# EAGLE board PCB (EAGLE 9.7.0)
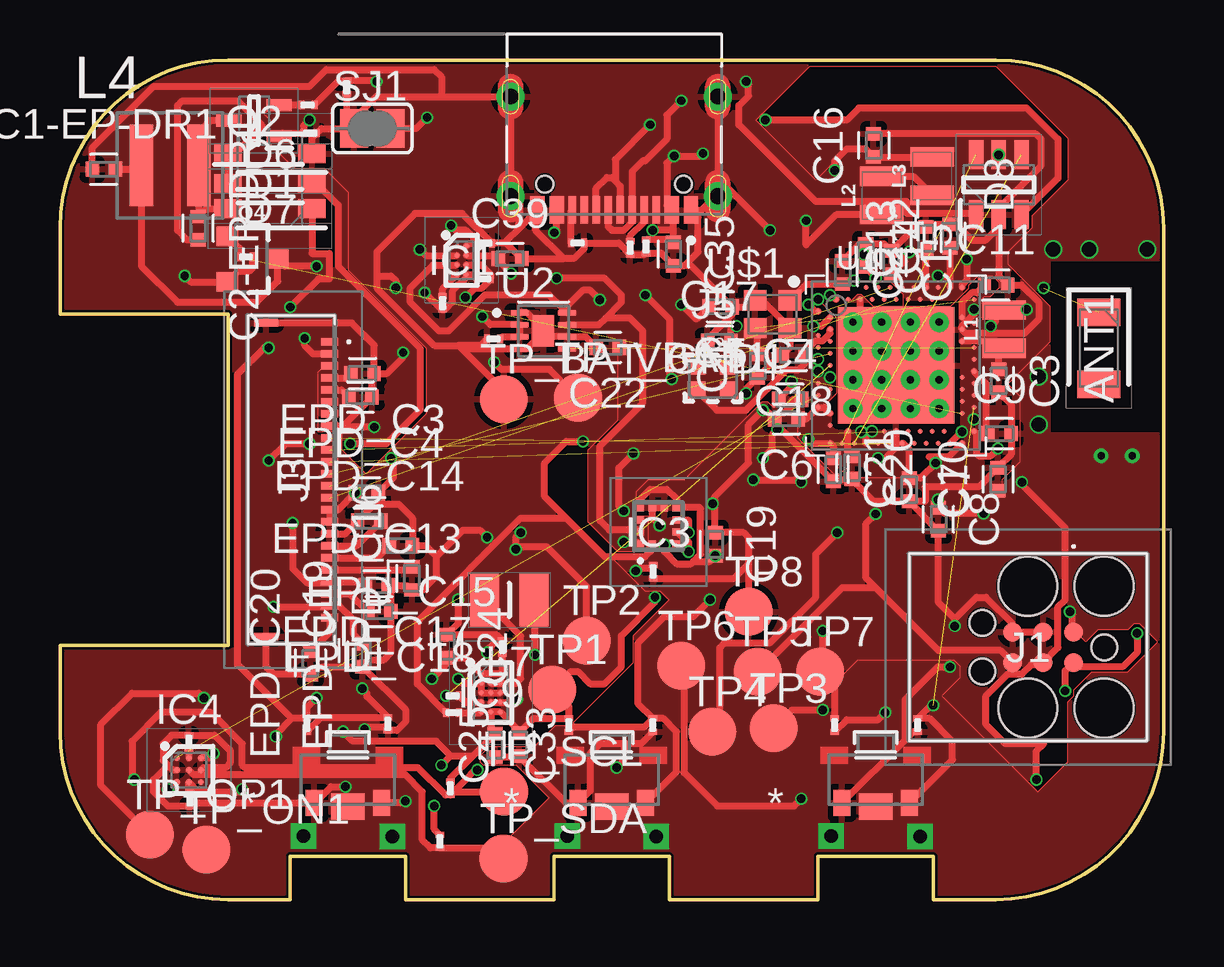
[diagram p0: board, top side]
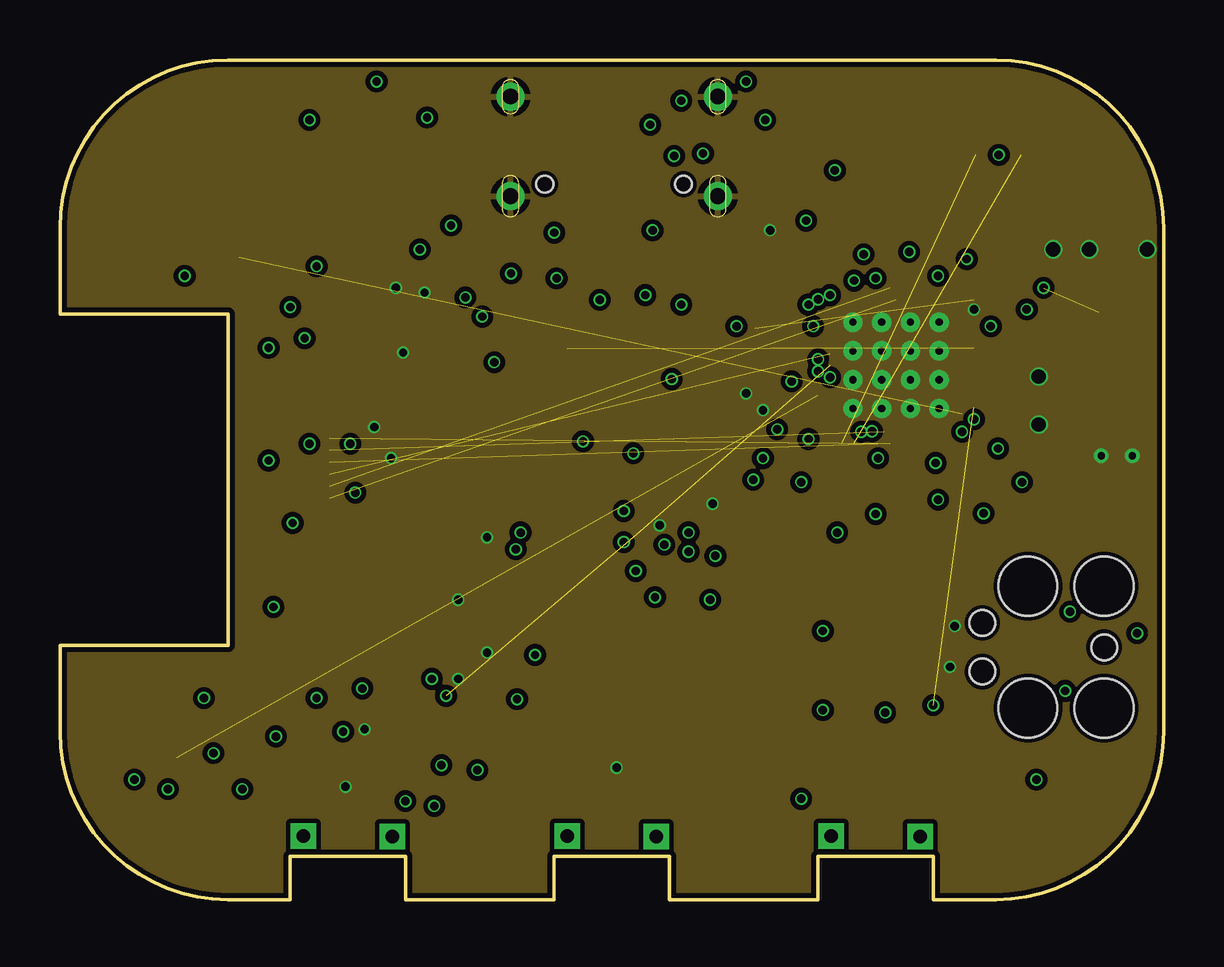
[diagram p1: board, inner layer Route2]
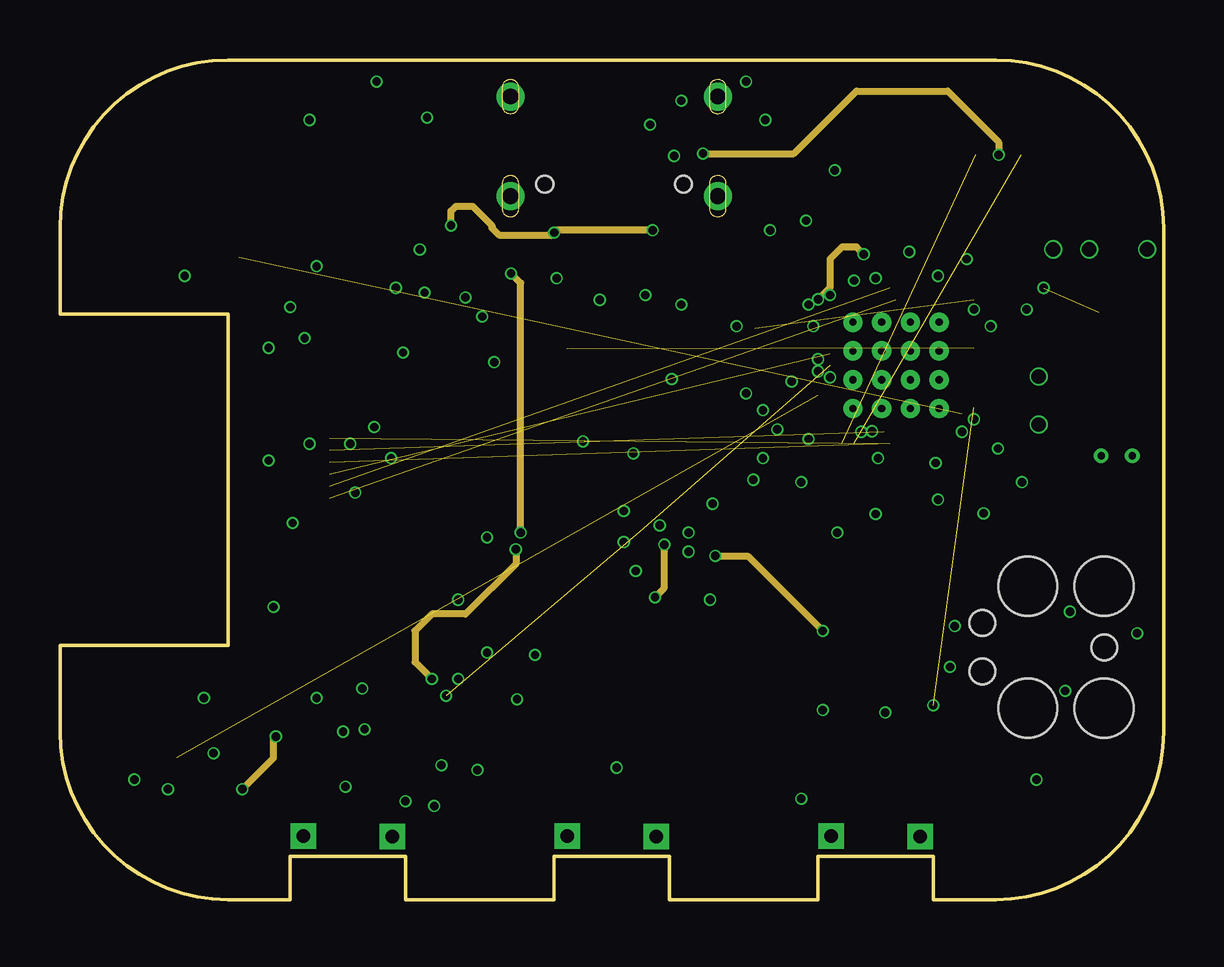
[diagram p2: board, inner layer Route15]
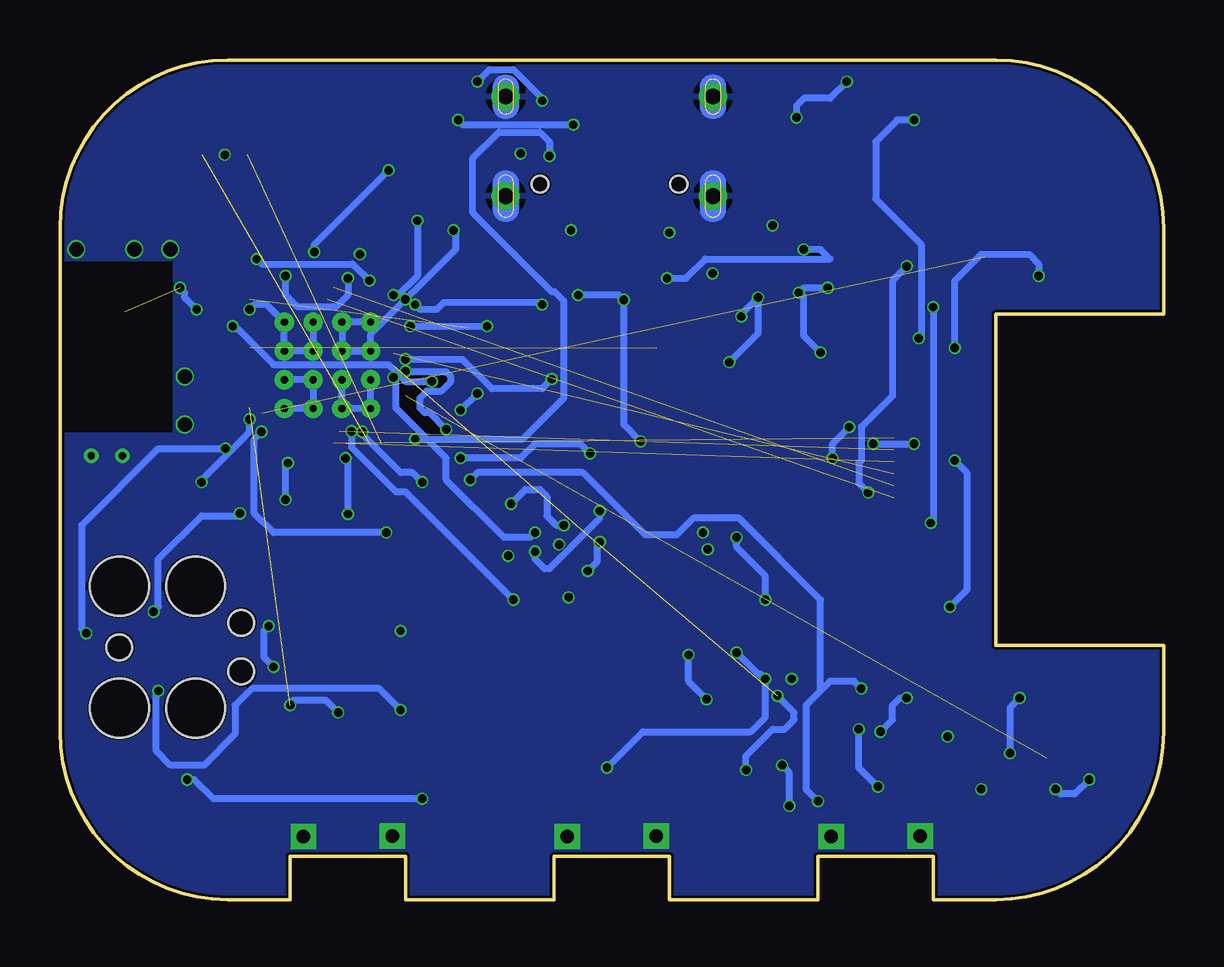
[diagram p3: board, bottom side, seen from below]

Size 46 x 35 mm. Coordinates in mm from the lower left corner, seen from the top.
Outline: 39,0 36.4,0 36.4,1.8 31.6,1.8 31.6,0 25.4,0 25.4,1.8 20.6,1.8 20.6,0 14.4,0 14.4,1.8 9.6,1.8 9.6,0 7,0 arc-90 0,7 0,10.6 7,10.6 7,24.4 0,24.4 0,28 arc-90 7,35 39,35 arc-90 46,28 46,7 arc-90 39,0
Copper layers (1+2*15+16): Top 0.035mm / dielectric 1.6mm / Route2 0.035mm / dielectric 0.15mm / Route15 0.035mm / dielectric 0.2mm / Bottom 0.035mm
Design rules "jlcpcb-2layers.dru *": minimum track width 0.04mm, minimum drill 0.3mm, track to track 0mil, track to pad 0mil, pad to pad 5mil, via to via 5mil, smd to smd 5mil, copper to edge 0.1mm, drill to drill 6mil, minimum pad ring 10mil, minimum via ring 3mil, stop-mask expansion 4mil, vias tented up to drill 0mil, thermal gap 10mil
tKeepout: area 41.3,19.5 to 45.8,26.6
tRestrict: area 41.3,19.5 to 45.8,26.6; 2 lines
bRestrict: area 41.3,19.5 to 45.8,26.6
vRestrict: area 41.3,19.5 to 45.8,26.6

## Footprints (pad centres in the part's own frame; a part is rotated, then mirrored left to right if it is on the bottom)
2450AT18B100E_ANTC3216X140N = smd 1.15 x 1.8: 1 -1.5,0; 2 1.5,0
CAPC1005X60 = smd 0.56 x 0.629: 1 -0.485,0; 2 0.485,0
GRM011R60J152KE01L_1_0201 = smd 0.35 x 0.25: 1 0,0.275; 2 0,-0.275
ESP32_C6_LIBRARY_5_SOD3716X135N = smd 1.15 x 0.8: 1 -1.75,0; 2 1.75,0
ESP32_C6_LIBRARY_3_SOT95P280X145-6N = smd 1.2 x 0.6: 1 -1.25,0.95; 2 -1.25,0; 3 -1.25,-0.95; 4 1.25,-0.95; 5 1.25,0; 6 1.25,0.95
BQ25180YBGR_BGA8C40P2X4_100X155X50 = smd 0.2 x 0.2: A1 -0.2,0.6; A2 0.2,0.6; B1 -0.2,0.2; B2 0.2,0.2; C1 -0.2,-0.2; C2 0.2,-0.2; D1 -0.2,-0.6; D2 0.2,-0.6
BMA423_BMA423 = smd 0.3 x 0.35: 1 -0.75,-0.775; 2 -0.25,-0.775; 3 0.25,-0.775; 4 0.75,-0.775; 7 0.75,0.775; 8 0.25,0.775; 9 -0.25,0.775; 10 -0.75,0.775 | smd 0.35 x 0.3: 5 0.775,-0.25; 6 0.775,0.25; 11 -0.775,0.25; 12 -0.775,-0.25
DRV2605YZFR_BGA9C50P3X3_144X144X62 = smd 0.25 x 0.25: A1 -0.5,0.5; A2 0,0.5; A3 0.5,0.5; B1 -0.5,0; B2 0,0; B3 0.5,0; C1 -0.5,-0.5; C2 0,-0.5; C3 0.5,-0.5
RT6160AWSC_BGA15C40P3X5_140X230X60 = smd 0.216 x 0.216: A1 -0.4,0.8; A2 0,0.8; A3 0.4,0.8; B1 -0.4,0.4; B2 0,0.4; B3 0.4,0.4; C1 -0.4,0; C2 0,0; C3 0.4,0; D1 -0.4,-0.4; D2 0,-0.4; D3 0.4,-0.4; E1 -0.4,-0.8; E2 0,-0.8; E3 0.4,-0.8
TC2030-IDC_TC2030IDC = smd 0.783 x 0.783: 1 -0.953,-0.635; 2 -0.953,0.635; 3 0.317,-0.635; 4 0.317,0.635; 5 1.588,-0.635; 6 1.588,0.635 | hole 2.451: -2.223,-2.54; -2.223,2.54; 0.952,-2.54; 0.952,2.54 | hole 1.067: -2.223,0; 2.857,-1.016; 2.857,1.016
503480-2400_5034802400 = smd 0.3 x 0.7: 1 -5.75,1.525; 2 -5.25,1.525; 3 -4.75,1.525; 4 -4.25,1.525; 5 -3.75,1.525; 6 -3.25,1.525; 7 -2.75,1.525; 8 -2.25,1.525; 9 -1.75,1.525; 10 -1.25,1.525; 11 -0.75,1.525; 12 -0.25,1.525; 13 0.25,1.525; 14 0.75,1.525; 15 1.25,1.525; 16 1.75,1.525; 17 2.25,1.525; 18 2.75,1.525; 19 3.25,1.525; 20 3.75,1.525; 21 4.25,1.525; 22 4.75,1.525; 23 5.25,1.525; 24 5.75,1.525 | smd 0.3 x 1: MP1 -6.54,-1.125; MP2 6.54,-1.125
KH-TYPE-C-16P_KINGHELM_KH-TYPE-C-16P = smd 0.6 x 1.15: A1_B12 -3.2,4.725; A4_B9 -2.4,4.725; A9_B4 2.4,4.725; A12_B1 3.2,4.725 | smd 0.3 x 1.15: A5 -1.25,4.725; A6 -0.25,4.725; A7 0.25,4.725; A8 1.25,4.725; B5 1.75,4.725; B6 0.75,4.725; B7 -0.75,4.725; B8 -1.75,4.725 | drill 0.65 pad 1.05: SH1 -4.32,0; SH2 4.32,0; SH3 -4.32,4.15; SH4 4.32,4.15 | hole 0.7: -2.89,3.65; 2.89,3.65
0805-WIDE = smd 0.8 x 1.8: 1 -0.8,0; 2 0.8,0
XFL4020 = smd 0.98 x 3.4: P$1 1,1.8; P$2 3.4,1.8
MLP2016SR47MT0S1_INDC2016X100N = smd 1.2 x 2.2: 1 -1.028,0; 2 1.028,0
ESP32_C6_LIBRARY_6_SOT65P210X110-3N = smd 1.05 x 0.5: 1 -1.05,0.65; 2 -1.05,-0.65; 3 1.05,0
ESP32_C6_LIBRARY_4_ESP32_C6_LIBRARY_4_ESP32_C6_LIBRARY_4_ESP32_C6_LIBRARY_4_ESP32_WROVER_SPARKFUN-DISCRETESEMI_SOT23-3 = smd 0.8 x 0.9: 1 -0.95,-1; 2 0.95,-1; 3 0,1.1
CPF0201D7K68C1_0201 = smd 0.35 x 0.25: 1 0,0.275; 2 0,-0.275
ESP32_C6_LIBRARY_7_JUMPER_SJ = smd 1.168 x 1.6: 1 -0.762,0; 2 0.762,0
2025-10-22_07-23-44_LIBRARY_SW_EVP-AKE31A_PAN = smd 0.711 x 1.092: 1 -1.4,-0.972; 2 1.4,-0.972 | drill 0.559 pad 0.914 square: 3 -1.858,-2.349; 4 1.848,-2.369 | smd 1.397 x 1.092: 5 0,-1.124
HECTOR_WATCH_1_TP20R = smd 2 x 2: TP 0,0
NORDIC_NRF_4_AQFN50P700X700X85_HS-74N = smd 4.85 x 4.85: P$74 0,0 | drill 0.3 pad 0.6: P$75 -1.8,1.8; P$76 -0.6,1.8; P$77 0.6,1.8; P$78 1.8,1.8; P$79 -1.8,0.6; P$80 -0.6,0.6; P$81 0.6,0.6; P$82 1.8,0.6; P$83 -1.8,-0.6; P$84 -0.6,-0.6; P$85 0.6,-0.6; P$86 1.8,-0.6; P$87 -1.8,-1.8; P$88 -0.6,-1.8; P$89 0.6,-1.8; P$90 1.8,-1.8 | smd 0.2 x 0.2: P$A8 -1.25,3.25; P$A10 -0.75,3.25; P$A12 -0.25,3.25; P$A14 0.25,3.25; P$A16 0.75,3.25; P$A18 1.25,3.25; P$A20 1.75,3.25; P$A22 2.25,3.25; P$A23 2.75,3.25; P$AA24 3.25,-2.25; P$AB2 -2.75,-2.5; P$AC5 -2,-2.75; P$AC9 -1,-2.75; P$AC11 -0.5,-2.75; P$AC13 0,-2.75; P$AC15 0.5,-2.75; P$AC17 1,-2.75; P$AC19 1.5,-2.75; P$AC21 2,-2.75; P$AC24 3.25,-2.75; P$AD2 -2.75,-3.25; P$AD4 -2.25,-3.25; P$AD6 -1.75,-3.25; P$AD8 -1.25,-3.25; P$AD10 -0.75,-3.25; P$AD12 -0.25,-3.25; P$AD14 0.25,-3.25; P$AD16 0.75,-3.25; P$AD18 1.25,-3.25; P$AD20 1.75,-3.25; P$AD22 2.25,-3.25; P$AD23 2.75,-3.25; P$B1 -3.25,2.75; P$B3 -2.5,2.75; P$B5 -2,2.75; P$B7 -1.5,2.75; P$B9 -1,2.75; P$B11 -0.5,2.75; P$B13 0,2.75; P$B15 0.5,2.75; P$B17 1,2.75; P$B19 1.5,2.75; P$B24 3.25,2.75; P$C1 -3.25,2.25; P$D2 -2.75,2; P$D23 2.75,2; P$E24 3.25,1.75; P$F2 -2.75,1.5; P$F23 2.75,1.5; P$G1 -3.25,1.25; P$H2 -2.75,1; P$H23 2.75,1; P$J1 -3.25,0.75; P$J24 3.25,0.75; P$K2 -2.75,0.5; P$L1 -3.25,0.25; P$L24 3.25,0.25; P$M2 -2.75,0; P$N1 -3.25,-0.25; P$N24 3.25,-0.25; P$P2 -2.75,-0.5; P$P23 2.75,-0.5; P$R1 -3.25,-0.75; P$R24 3.25,-0.75; P$T2 -2.75,-1; P$T23 2.75,-1; P$U1 -3.25,-1.25; P$U24 3.25,-1.25; P$V23 2.75,-1.5; P$W1 -3.25,-1.75; P$W24 3.25,-1.75; P$Y2 -2.75,-2; P$Y23 2.75,-2
ESP32_C6_LIBRARY_SON50P200X200X80-9N = smd 0.76 x 0.27: 1 -0.985,0.75; 2 -0.985,0.25; 3 -0.985,-0.25; 4 -0.985,-0.75; 5 0.985,-0.75; 6 0.985,-0.25; 7 0.985,0.25; 8 0.985,0.75 | smd 0.9 x 1.3: 9 0,0
NORDIC_NRF_BT-XTAL_2016_N = smd 0.95 x 0.85: 1 -0.725,-0.575; 2 0.725,-0.575; 3 0.725,0.575; 4 -0.725,0.575
CRYSTAL-SMD-2.0X1.6MM = smd 0.75 x 0.7: 1 -0.675,-0.5; 2 0.675,-0.5; 3 0.675,0.5; 4 -0.675,0.5

## Placement (x,y rotation side)
ANT1  2450AT18B100E  [2450AT18B100E_ANTC3216X140N]  43.3,22.98 270 top
C1  12pF  [CAPC1005X60]  29.08,22.24 90 top
C1-EP-DR1  10uF  [CAPC1005X60]  1.83,30.44 0 top
C2  12pF  [CAPC1005X60]  32.62,26.14 270 top
C2-EP-DR1  4.7uF/25V  [CAPC1005X60]  5.76,27.98 270 top
C3  1pF  [CAPC1005X60]  39.13,21.63 270 top
C4  1pF  [CAPC1005X60]  30.44,20.85 0 top
C5  100nF  [CAPC1005X60]  27.54,24.71 179.9 top
C6  4.7μF  [CAPC1005X60]  30.28,20.04 180 top
C7  100nF  [CAPC1005X60]  35.4,17.08 270 top
C8  100nF  [CAPC1005X60]  36.62,15.85 270 top
C9  820pF N.C.  [CAPC1005X60]  39.16,19.42 0 top
C10  N.C.  [CAPC1005X60]  39.1,17.52 90 top
C11  100pF  [CAPC1005X60]  39.02,25.62 0 top
C12  100nF  [CAPC1005X60]  37.1,27.66 90 top
C13  N.C.  [CAPC1005X60]  36.1,27.56 90 top
C14  4.7μF  [CAPC1005X60]  33.58,26.86 270 top
C15  1.0μF  [CAPC1005X60]  34.65,26.56 270 top
C16  47nF  [CAPC1005X60]  33.91,31.44 90 top
C17  12pF  [CAPC1005X60]  27.48,23.27 0 top
C18  12pF  [CAPC1005X60]  30.58,22.69 180 top
C19  100nF  [CAPC1005X60]  27.32,14.81 270 top
C20  4.7μF  [CAPC1005X60]  33.01,18 270 top
C21  4.7μF  [CAPC1005X60]  32.23,17.92 270 top
C22  N.C.  [CAPC1005X60]  22.84,23.02 180 top
C23  0.1uF  [GRM011R60J152KE01L_1_0201]  18.44,10.52 180 top
C24  10uF  [CAPC1005X60]  16.12,10.56 270 top
C25  22uF  [CAPC1005X60]  19.14,6.46 90 top
C26  0.1uF  [GRM011R60J152KE01L_1_0201]  18.07,23.37 90 top
C28  0.1uF  [GRM011R60J152KE01L_1_0201]  24.43,27.23 0 top
C33  22uF  [CAPC1005X60]  18.13,6.43 270 top
C35  4.7uF  [CAPC1005X60]  25.57,26.91 270 top
C36  0.1uF  [GRM011R60J152KE01L_1_0201]  5.41,4.17 180 top
C37  1uF  [GRM011R60J152KE01L_1_0201]  17.67,25.88 90 top
C38  1uF  [GRM011R60J152KE01L_1_0201]  17.73,27.36 270 top
C39  10uF  [CAPC1005X60]  18.76,26.72 0 top
C40  1uF  [GRM011R60J152KE01L_1_0201]  5.37,6.58 0 top
C41  1uF  [GRM011R60J152KE01L_1_0201]  13.67,7.32 180 top
C44  1uF  [GRM011R60J152KE01L_1_0201]  24.71,7.27 180 top
C45  1uF  [GRM011R60J152KE01L_1_0201]  35.75,7.27 180 top
D1  MBR0530  [ESP32_C6_LIBRARY_5_SOD3716X135N]  8.76,29.85 0 top
D6  MBR0530  [ESP32_C6_LIBRARY_5_SOD3716X135N]  8.76,31.1 180 top
D7  MBR0530  [ESP32_C6_LIBRARY_5_SOD3716X135N]  8.74,28.8 180 top
D8  USBLC6-2SC6Y  [ESP32_C6_LIBRARY_3_SOT95P280X145-6N]  39.13,29.8 90 top
EPD_C3  1uF/50V  [CAPC1005X60]  12.61,21.93 180 top
EPD_C4  1uF/50V  [CAPC1005X60]  12.52,20.95 180 top
EPD_C13  0.1uF/50V  [CAPC1005X60]  12.79,16.96 180 top
EPD_C14  1uF/50V  [CAPC1005X60]  12.89,15.77 0 top
EPD_C15  1uF/50V  [CAPC1005X60]  14.21,14.75 180 top
EPD_C16  1uF/50V  [CAPC1005X60]  14.67,13.39 90 top
EPD_C17  1uF/50V  [CAPC1005X60]  13.21,13.09 180 top
EPD_C18  1uF/50V  [CAPC1005X60]  13.31,12 180 top
EPD_C19  1uF/50V  [CAPC1005X60]  12.62,10.19 90 top
EPD_C20  1uF/50V  [CAPC1005X60]  10.44,9.86 90 top
IC1  BQ25180YBGR  [BQ25180YBGR_BGA8C40P2X4_100X155X50]  16.74,26.65 0 top
IC3  BMA421  [BMA423_BMA423]  24.94,15.57 0 top
IC4  DRV2605YZFR  [DRV2605YZFR_BGA9C50P3X3_144X144X62]  5.37,5.4 0 top
IC9  RT6160AWSC  [RT6160AWSC_BGA15C40P3X5_140X230X60]  17.96,8.62 0 top
J1  TC2030-IDC_TC2030-IDC  [TC2030-IDC_TC2030IDC]  41.3,10.52 180 top
J3  503480-2400  [503480-2400_5034802400]  9.72,17.5 270 top
J5  KH-TYPE-C-16P  [KH-TYPE-C-16P_KINGHELM_KH-TYPE-C-16P]  23.1,33.47 180 top
L1  3.9nH  [0805-WIDE]  39.35,23.78 90 top
L2  10μH  [0805-WIDE]  34.25,29.35 90 top
L3  15nH  [0805-WIDE]  36.36,30.16 90 top
L4  68uH  [XFL4020]  2.39,28.8 0 top
L7  FTC252012SR47MBCA  [MLP2016SR47MT0S1_INDC2016X100N]  18.73,12.48 0 top
Q2  SI1308EDL-T1-GE3  [ESP32_C6_LIBRARY_6_SOT65P210X110-3N]  8.09,32.47 180 top
Q4  20V/4.2A/52mΩ/1.4W  [ESP32_C6_LIBRARY_4_ESP32_C6_LIBRARY_4_ESP32_C6_LIBRARY_4_ESP32_C6_LIBRARY_4_ESP32_WROVER_SPARKFUN-DISCRETESEMI_SOT23-3]  7.98,26.7 270 top
R1  10k  [CPF0201D7K68C1_0201]  10.29,7.27 180 top
R1_EP_DR1  0.47  [CPF0201D7K68C1_0201]  10.33,33.13 270 top
R1_USB1  5K1  [CPF0201D7K68C1_0201]  23.77,27.17 180 top
R2  0  [CPF0201D7K68C1_0201]  16.37,7.79 90 top
R2_EP_DR1  10K  [CPF0201D7K68C1_0201]  10.43,31.95 270 top
R2_USB1  5K1  [CPF0201D7K68C1_0201]  21.57,27.37 90 top
R3  0  [CPF0201D7K68C1_0201]  24.73,13.67 180 top
R4  0  [CPF0201D7K68C1_0201]  16.37,8.49 90 top
R6  10k  [CPF0201D7K68C1_0201]  21.21,7.27 180 top
R9  10K  [CPF0201D7K68C1_0201]  15.95,24.87 180 top
R10  10k  [CPF0201D7K68C1_0201]  32.29,7.27 180 top
R17  3K3  [CPF0201D7K68C1_0201]  16.27,4.63 0 top
R18  3K3  [CPF0201D7K68C1_0201]  15.83,2.43 0 top
R_PWR_EPD1  10K  [CPF0201D7K68C1_0201]  7.75,26.79 90 top
R_TYPE_SEL1  2.2  [CPF0201D7K68C1_0201]  11.95,33.87 180 top
SJ1  0  [ESP32_C6_LIBRARY_7_JUMPER_SJ]  13.02,32.14 0 top
SW_DN  2025-10-22_07-23-44_LIBRARY_EVP-AKE31ASW_EVP-AKE31A_PAN  [2025-10-22_07-23-44_LIBRARY_SW_EVP-AKE31A_PAN]  34,5 0 top
SW_ENT  2025-10-22_07-23-44_LIBRARY_EVP-AKE31ASW_EVP-AKE31A_PAN  [2025-10-22_07-23-44_LIBRARY_SW_EVP-AKE31A_PAN]  23,5 0 top
SW_UP  2025-10-22_07-23-44_LIBRARY_EVP-AKE31ASW_EVP-AKE31A_PAN  [2025-10-22_07-23-44_LIBRARY_SW_EVP-AKE31A_PAN]  12,5 0 top
TP1  HECTOR_WATCH_1_TPTP20R  [HECTOR_WATCH_1_TP20R]  20.53,8.75 0 top
TP2  HECTOR_WATCH_1_TPTP20R  [HECTOR_WATCH_1_TP20R]  21.95,10.8 0 top
TP3  HECTOR_WATCH_1_TPTP20R  [HECTOR_WATCH_1_TP20R]  29.74,7.14 0 top
TP4  HECTOR_WATCH_1_TPTP20R  [HECTOR_WATCH_1_TP20R]  27.19,7 0 top
TP5  HECTOR_WATCH_1_TPTP20R  [HECTOR_WATCH_1_TP20R]  29.09,9.49 0 top
TP6  HECTOR_WATCH_1_TPTP20R  [HECTOR_WATCH_1_TP20R]  25.9,9.74 0 top
TP7  HECTOR_WATCH_1_TPTP20R  [HECTOR_WATCH_1_TP20R]  31.68,9.5 0 top
TP8  HECTOR_WATCH_1_TPTP20R  [HECTOR_WATCH_1_TP20R]  28.71,11.99 0 top
TP_BAT_GND1  HECTOR_WATCH_1_TPTP20R  [HECTOR_WATCH_1_TP20R]  18.51,20.86 0 top
TP_ON1  HECTOR_WATCH_1_TPTP20R  [HECTOR_WATCH_1_TP20R]  6.11,2.09 0 top
TP_OP1  HECTOR_WATCH_1_TPTP20R  [HECTOR_WATCH_1_TP20R]  3.76,2.7 0 top
TP_SCL  HECTOR_WATCH_1_TPTP20R  [HECTOR_WATCH_1_TP20R]  18.51,4.5 0 top
TP_SDA  HECTOR_WATCH_1_TPTP20R  [HECTOR_WATCH_1_TP20R]  18.49,1.7 0 top
TP_VBAT1  HECTOR_WATCH_1_TPTP20R  [HECTOR_WATCH_1_TP20R]  21.59,20.92 0 top
U1  NRF52840_QF  [NORDIC_NRF_4_AQFN50P700X700X85_HS-74N]  34.85,22.27 0 top
U2  MAX17048G+T10  [ESP32_C6_LIBRARY_SON50P200X200X80-9N]  20.15,23.71 0 top
U$1  [NORDIC_NRF_BT-XTAL_2016_N]  29.7,24.4 0 top
X2  32MHz  [CRYSTAL-SMD-2.0X1.6MM]  27.22,21.74 0 top

## Library data of the parts
ANT1 = InkTime_v5; ARROW_PART_NUMBER: 2450AT18B100E; ARROW_PRICE-STOCK: https://www.arrow.com/en/products/2450at18b100e/johanson-dielectrics?utm_currency=USD&region=nac; DESCRIPTION: Antennas 2.45GHz ANTENNA; HEIGHT: 1.4mm; MANUFACTURER_NAME: JOHANSON TECHNOLOGY; MANUFACTURER_PART_NUMBER: 2450AT18B100E; MOUSER_PART_NUMBER: 609-2450AT18B100E; MOUSER_PRICE-STOCK: https://www.mouser.co.uk/ProductDetail/Johanson-Technology/2450AT18B100E?qs=yCnrNFeXz%252Bh5MFsFIXGZGA%3D%3D
C1 C1-EP-DR1 C2 C2-EP-DR1 C3-C22 C24 C25 C33 C35 C39 EPD_C3 EPD_C4 EPD_C13-EPD_C20 = Tinkercad; CATEGORY: Capacitor
C23 C26 C28 C36-C38 C40 C41 C44 C45 R1 R1_EP_DR1 R1_USB1 R2 R2_EP_DR1 R2_USB1 R3 R4 R6 R9 R10 R17 R18 R_PWR_EPD1 R_TYPE_SEL1 SJ1 TP1-TP8 TP_BAT_GND1 TP_ON1 TP_OP1 TP_SCL TP_SDA TP_VBAT1 U1 = InkTime_v5
D1 D6 D7 = InkTime_v5; AVAILABILITY: In Stock; CHECK_PRICES: https://www.snapeda.com/parts/MBR0530/Onsemi/view-part/?ref=eda; DESCRIPTION: Diode Schottky 30 V 500mA Surface Mount SOD-123; MF: ON Semiconductor; MP: MBR0530; PACKAGE: SOD-123-2 ON Semiconductor; PRICE: None; PURCHASE-URL: https://www.snapeda.com/api/url_track_click_mouser/?unipart_id=179458&manufacturer=ON Semiconductor&part_name=MBR0530&search_term=None; SNAPEDA_LINK: https://www.snapeda.com/parts/MBR0530/Onsemi/view-part/?ref=snap
D8 = InkTime_v5; AVAILABILITY: In Stock; CHECK_PRICES: https://www.snapeda.com/parts/USBLC6-2SC6Y/STMicroelectronics/view-part/?ref=eda; DESCRIPTION: 17V Clamp 5A (8/20µs) Ipp Tvs Diode Surface Mount SOT-23-6; MF: STMicroelectronics; MP: USBLC6-2SC6Y; PACKAGE: SOT-23-6 STMicroelectronics; PRICE: None; SNAPEDA_LINK: https://www.snapeda.com/parts/USBLC6-2SC6Y/STMicroelectronics/view-part/?ref=snap
IC1 = InkTime_v5; ARROW_PART_NUMBER: BQ25180YBGR; ARROW_PRICE-STOCK: https://www.arrow.com/en/products/bq25180ybgr/texas-instruments?utm_currency=USD&region=nac; DESCRIPTION: Charger IC Lithium Ion/Polymer, Lithium Iron Phosphate 8-DSBGA (1.6x1.1); HEIGHT: 0.5mm; MANUFACTURER_NAME: Texas Instruments; MANUFACTURER_PART_NUMBER: BQ25180YBGR; MOUSER_PART_NUMBER: 595-BQ25180YBGR; MOUSER_PRICE-STOCK: https://www.mouser.co.uk/ProductDetail/Texas-Instruments/BQ25180YBGR?qs=doiCPypUmgEWjAK%252BJAX6Tw%3D%3D
IC3 = InkTime_v5; ARROW_PART_NUMBER: BMA423; ARROW_PRICE-STOCK: https://www.arrow.com/en/products/bma423/bosch; DESCRIPTION: Accelerometers Triaxial low-g 12bit Acceleration Sensor; HEIGHT: 1mm; MANUFACTURER_NAME: BOSCH; MANUFACTURER_PART_NUMBER: BMA423; MOUSER_PART_NUMBER: 262-BMA423; MOUSER_PRICE-STOCK: https://www.mouser.co.uk/ProductDetail/Bosch-Sensortec/BMA423?qs=HXFqYaX1Q2xC%252BSgeGoX3mg%3D%3D
IC4 = InkTime_v5; ARROW_PART_NUMBER: DRV2605YZFR; ARROW_PRICE-STOCK: https://www.arrow.com/en/products/drv2605yzfr/texas-instruments?region=nac; DESCRIPTION: Haptic Driver for ERM/LRA with Built-In Library and Smart Loop Architecture; HEIGHT: 0.625mm; MANUFACTURER_NAME: Texas Instruments; MANUFACTURER_PART_NUMBER: DRV2605YZFR
IC9 = InkTime_v5; DESCRIPTION: Buck-Boost Regulator Positive Output Step-Up/Step-Down I2C DC-DC Controller IC 15-WL-CSP (BSC) (1.4x2.3); HEIGHT: 0.6mm; MANUFACTURER_NAME: RICHTEK; MANUFACTURER_PART_NUMBER: RT6160AWSC; MOUSER_PART_NUMBER: 835-RT6160AWSC; MOUSER_PRICE-STOCK: https://www.mouser.co.uk/ProductDetail/Richtek/RT6160AWSC?qs=amGC7iS6iy%2FLd9PSoixZXQ%3D%3D
J1 = InkTime_v5; DESCRIPTION: CABLE ADAPTER 6 POS; HEIGHT: 19mm; MANUFACTURER_NAME: Tag Connect; MANUFACTURER_PART_NUMBER: TC2030-IDC
J3 = InkTime_v5; DESCRIPTION: FFC & FPC Connectors 0.5mm FPC RA SMT Dual Contact 24Ckt; HEIGHT: 1.87mm; MANUFACTURER_NAME: Molex; MANUFACTURER_PART_NUMBER: 503480-2400; MOUSER_PART_NUMBER: 538-503480-2400; MOUSER_PRICE-STOCK: https://www.mouser.co.uk/ProductDetail/Molex/503480-2400?qs=OAhjpuo3Vu7efIoxFh9AOw%3D%3D
J5 = InkTime_v5; AVAILABILITY: Not in stock; CHECK_PRICES: https://www.snapeda.com/parts/KH-TYPE-C-16P/Kinghelm/view-part/?ref=eda; MF: kinghelm; MP: KH-TYPE-C-16P; PACKAGE: None; PRICE: None; SNAPEDA_LINK: https://www.snapeda.com/parts/KH-TYPE-C-16P/Kinghelm/view-part/?ref=snap
L1-L3 = SparkFun-Coils; PROD_ID: NDUC-14237
L4 = SparkFun-Coils; PROD_ID: INDUC-13855
L7 = InkTime_v5; DESCRIPTION: SMD / SMT Inductors (Coils), L=0.47?H, L x W x T :; HEIGHT: 1mm; JLCPCB: https://jlcpcb.com/partdetail/6763488-FTC252012SR47MBCA/C5832368; MANUFACTURER_NAME: TDK; MANUFACTURER_PART_NUMBER: FTC252012SR47MBCA
Q2 = InkTime_v5; AVAILABILITY: In Stock; CHECK_PRICES: https://www.snapeda.com/parts/SI1308EDL-T1-GE3/Vishay+Siliconix/view-part/?ref=eda; DESCRIPTION: Si1308EDL-T1-GE3 N-channel MOSFET Transistor, 1.5 A, 30 V, 3-Pin SC-70 | Siliconix / Vishay SI1308EDL-T1-GE3; MF: Vishay Siliconix; MP: SI1308EDL-T1-GE3; PACKAGE: SOT-323 Vishay Semiconductor; PRICE: None; PURCHASE-URL: https://www.snapeda.com/api/url_track_click_mouser/?unipart_id=274603&manufacturer=Vishay Siliconix&part_name=SI1308EDL-T1-GE3&search_term=None; SNAPEDA_LINK: https://www.snapeda.com/parts/SI1308EDL-T1-GE3/Vishay+Siliconix/view-part/?ref=snap
Q4 = InkTime_v5; PROD_ID: TRAN-14388
SW_DN SW_ENT SW_UP = InkTime_v5_button fara modifcaturi; COPYRIGHT: Copyright (C) 2025 Ultra Librarian. All rights reserved.; DIGI-KEY_PART_NUMBER_1: P123437TR-ND; DIGI-KEY_PART_NUMBER_2: P123437CT-ND; DIGI-KEY_PART_NUMBER_3: P123437DKR-ND; MANUFACTURER_NAME: Panasonic; MANUFACTURER_PART_NUMBER: EVP-AKE31A
U2 = InkTime_v5; AVAILABILITY: In Stock; CHECK_PRICES: https://www.snapeda.com/parts/MAX17048G+T10/Analog+Devices/view-part/?ref=eda; DESCRIPTION: 3µA 1-Cell/2-Cell Fuel Gauge with ModelGauge; MF: Analog Devices; MP: MAX17048G+T10; PACKAGE: TDFN-8 Maxim; PRICE: None; PURCHASE-URL: https://www.snapeda.com/api/url_track_click_mouser/?unipart_id=329239&manufacturer=Analog Devices&part_name=MAX17048G+T10&search_term=None; SNAPEDA_LINK: https://www.snapeda.com/parts/MAX17048G+T10/Analog+Devices/view-part/?ref=snap
U$1 = InkTime_v5_button fara modifcaturi
X2 = SparkFun-Clocks; PROD_ID: XTAL-13459

## Nets
3V3: C6.1 C7.1 C8.1 C12.1 C14.2 C19.2 C25.2 C33.1 C36.2 IC3.3 IC3.7 IC3.10 IC4.C2 IC9.E2 IC9.E3 J1.1 Q4.2 R1.2 R6.2 R10.2 R17.1 R18.1 R_PWR_EPD1.2 TP1.TP TP7.TP U1.P$A22 U1.P$AD14 U1.P$AD23 U1.P$B1 U1.P$W1 U1.P$Y2
3V3/1.7D2: C40.2 IC4.A2
ALERT: U1.P$J24 U2.5
D+: D8.4 U1.P$AD6
D-: D8.6 U1.P$AD4
DEC1: C5.2 U1.P$C1
DEC3: C11.1 U1.P$D23
DEC4_6: C10.1 C15.2 C16.1 L3.2 U1.P$B5 U1.P$E24
DN: D8.1 J5.A7 J5.B7
DP: D8.3 J5.A6 J5.B6
EPD_3V3: C1-EP-DR1.2 EPD_C13.2 J3.15 J3.16 L4.P$1 Q4.3
EPD_BUSY: J3.9 U1.P$AD12
EPD_CS: J3.12 U1.P$K2
EPD_DC: J3.11 U1.P$AD10
EPD_RST: J3.10 U1.P$AC11
GDR: J3.2 Q2.1 R2_EP_DR1.2
GND: C1-EP-DR1.1 C1.1 C2.1 C3.2 C4.2 C5.1 C6.2 C7.2 C8.2 C9.2 C10.2 C11.2 C12.2 C13.2 C14.1 C15.1 C16.2 C17.1 C18.2 C19.1 C20.2 C21.2 C22.2 C23.2 C24.1 C25.1 C26.1 C28.2 C33.2 C35.2 C36.1 C37.1 C38.1 C39.2 C40.1 C41.1 C44.1 C45.1 D6.1 D8.2 EPD_C3.1 EPD_C4.1 EPD_C13.1 EPD_C14.1 EPD_C15.1 EPD_C16.1 EPD_C17.1 EPD_C18.1 EPD_C19.1 EPD_C20.1 IC1.D2 IC3.8 IC3.9 IC4.B1 IC4.B3 IC9.B1 IC9.C1 IC9.C2 IC9.C3 J1.3 J1.5 J3.8 J3.17 J3.MP1 J3.MP2 J5.A1_B12 J5.A12_B1 J5.SH1 J5.SH2 J5.SH3 J5.SH4 R1_USB1.1 R2_EP_DR1.1 R2_USB1.2 R3.1 R9.1 R_TYPE_SEL1.1 SJ1.1 SW_DN.1 SW_ENT.1 SW_UP.1 TP8.TP TP_BAT_GND1.TP U1.P$74 U1.P$75 U1.P$76 U1.P$77 U1.P$78 U1.P$79 U1.P$80 U1.P$81 U1.P$82 U1.P$83 U1.P$84 U1.P$85 U1.P$86 U1.P$87 U1.P$88 U1.P$89 U1.P$90 U1.P$B7 U1.P$F23 U2.1 U2.4 U2.6 U2.9 U$1.2 U$1.4
HAPTIC_EN: IC4.A1 U1.P$U1
IMU_INT1: IC3.5 U1.P$N1
IMU_INT2: IC3.6 U1.P$P2
LX1: IC9.B2 IC9.B3 L7.1
LX2: IC9.D2 IC9.D3 L7.2
MOSI: J3.14 U1.P$B13
N$1: IC9.D1 R4.2
N$2: IC9.E1 R2.2
N$3: IC3.1 R3.2
N$4: C3.1 L1.1 U1.P$H23
N$5: ANT1.1 C4.1 C22.1 L1.2
N$7: IC1.D1 R9.2
N$10: C9.1 U1.P$N24
N$22: C2-EP-DR1.1 D7.2 L4.P$2 Q2.3
N$23: R1_EP_DR1.1 R_TYPE_SEL1.2 SJ1.2
N$24: C2-EP-DR1.2 D1.1 D6.2
N$25: EPD_C3.2 J3.4
N$26: EPD_C4.2 J3.5
N$27: EPD_C14.2 J3.18
N$28: EPD_C15.2 J3.19
N$29: EPD_C16.2 J3.20
N$30: EPD_C18.2 J3.22
N$31: EPD_C20.2 J3.24
N$32: J5.A5 R1_USB1.2
N$33: J5.B5 R2_USB1.1
N$34: IC4.C3
N$38: C20.1 U1.P$AC5
N$56: L2.2 L3.1
N$57: L2.1 U1.P$B3
N$71: C13.1 U1.P$A18
N$74: C2.2 U1.P$A23 U$1.3
N$75: C1.2 U1.P$B24 U$1.1
OUT+: IC4.A3 TP_OP1.TP
OUT-: TP_ON1.TP
P0.00/XL1: C17.2 U1.P$D2 X2.3
P0.01/XL2: C18.1 U1.P$F2 X2.1
P0.04: U1.P$J1
P0.09: U1.P$L24
P0.13: C41.2 R1.1 SW_UP.2 U1.P$AD8
P0.14: C44.2 R6.1 SW_ENT.2 U1.P$AC9
P0.19: U1.P$AC15
P0.20: U1.P$AD16
P0.21: U1.P$AC17
P0.22: U1.P$AD18
P0.23: U1.P$AC19
P0.24: U1.P$AD20
P0.25: U1.P$AC21
P0.26: U1.P$G1
P0.27: U1.P$H2
P0.28: U1.P$B11
P0.29: U1.P$A10
P0.30: U1.P$B9
P0.31: U1.P$A8
P1.01: Q4.1 R_PWR_EPD1.1 U1.P$Y23
P1.02: C45.2 R10.1 SW_DN.2 U1.P$W24
P1.03: U1.P$V23
P1.04: U1.P$U24
P1.05: U1.P$T23
P1.06: U1.P$R24
P1.07: U1.P$P23
P1.09: U1.P$R1
P1.10: U1.P$A20
P1.11: U1.P$B19
P1.12: U1.P$B17
P1.13: U1.P$A16
P1.14: U1.P$B15
P1.15: U1.P$A14
PMIC_INIT: IC1.A1
PMIC_INT: U1.P$T2
PREVGH: D7.1 EPD_C17.2 J3.21
PREVGL: D1.2 EPD_C19.2 J3.23
RESE: J3.3 Q2.2 R1_EP_DR1.2
RESET: J1.6 TP5.TP U1.P$AC13
SCK: J3.13 U1.P$A12
SCL: IC1.B1 IC3.12 IC4.C1 R4.1 R17.2 TP_SCL.TP U1.P$M2 U2.7
SDA: IC1.C1 IC3.2 IC4.B2 R2.1 R18.2 TP_SDA.TP U1.P$L1 U2.8
SWDCLK: J1.4 TP6.TP U1.P$AA24
SWDIO: J1.2 TP3.TP U1.P$AC24
SWO: TP4.TP U1.P$AD22
VBAT: C26.2 C37.2 IC1.C2 TP_VBAT1.TP U2.2 U2.3
VBUS: C21.1 C28.1 C35.1 C38.2 D8.5 IC1.A2 J5.A4_B9 J5.A9_B4 U1.P$AD2
VREG: C23.1 C24.2 C39.1 IC1.B2 IC9.A1 IC9.A2 IC9.A3 TP2.TP

## Tracks (layer width: path | path; a pad name or v marks a point on that pad's centre or on a via)
3V3  (via drill 0.35)
  Top 0.04: C6.1 30.75,20 30.75,19.25 32.25,17.75 32.5,17.75 32.75,18 32.93,17.82 33.35,17.82 33.35,17.57 C7.1 | J1.1 42.5,11 42.75,10.75 43.25,11.25 44.5,11.25 44.75,11.5 45,11.5 45.75,10.75 44.5,9.5 43,9.5 42.25,8.75 42.25,8.5 42,8.25 42,5.75 40.75,4.5 36.75,8.5 37.5,9.25 37.5,9.75 37.25,10 33.25,10 32.25,9 TP7.TP | U1.P$B1 31.62,25 32.38,24.25 32.38,21.12 31.88,20.62 31.85,20.52
  Top 0.3: IC3.10 24.19,16.69 24.6,17.1 25.3,17.1 25.69,16.71 IC3.7 26.66,16.34 26.7,16.3 26.7,14.4 26.4,14.1 | IC3.3 25.19,14.51 25.7,14 26.3,14 26.4,14.1 | 26.4,14.1 27.09,14.1 C19.2 | 9.65,7.54 R1.2 10.29,7.99 v10.7,8.4 | 9.65,7.54 7.4,9.8 7.4,21.9 8.5,23 v8.7,23 | v5.2,26 5.45,25.75 Q4.2 7.43,26.2 7.9,26.2 8.02,26.32 R_PWR_EPD1.2 | R17.1 16.27,5.05 17.21,5.99 | 17.21,5.99 C33.1 17.96,7.09 IC9.E2 IC9.E3 19.14,7.04 C25.2 19.74,7.54 R6.2 21.21,8.07 TP1.TP 21.29,9.51 21.59,9.51 22.1,9 22.7,9 23.4,9.7 23.4,11 24.8,12.4 v24.8,12.6 | C36.2 5.37,4.48 IC4.C2 5.77,4.5 7.5,4.5 v7.6,4.6 | C12.1 37.1,25.8 | 37.1,25.8 U1.P$A22 | U1.P$Y2 31.85,20.52 U1.P$W1 31.12,20.04 C6.1 | U1.P$AD23 37.05,18.47 36.23,18.47 v36.5,18.2 35.87,17.57 C7.1 35.4,18.77 35.35,18.77 35.35,18.82 35.15,19.02 U1.P$AD14 | v34,25.9 34,26 33.95,26 C14.2 33.5,26.45 v33.5,26.9 | v36.6,26 36.9,26 37.1,25.8 | R18.1 15.6,2.94 v15.6,3.9 | v15.9,5.6 16.29,5.99 | 16.29,5.99 17.21,5.99 | 16.29,5.99 15.68,6.6 12.2,6.6 v11.8,7 | R10.2 32.29,8.9 TP7.TP 31.8,9.62 v31.8,11.2 | v9,6.8 9,6.89 9.65,7.54 | J1.1 42.2,11.21 42.2,11.9 v42.1,12 | v38.5,16.1 36.86,16.1 C8.1 36.6,16.36 v36.6,16.67
  Route15 0.3: v31.8,11.2 28.7,14.3 27.34,14.3 C19.2 | v24.8,12.6 25.19,12.99 IC3.3 | v7.6,4.6 8.9,5.9 8.9,6.7 v9,6.8 | v33.5,26.9 33.2,27.2 32.6,27.2 32.1,26.7 32.1,25.52 U1.P$B1
  Bottom 0.3: v8.7,23 8.7,25.8 7.6,26.9 5.6,26.9 5.2,26.5 v5.2,26 | v36.5,18.2 36.6,18.1 v36.6,16.67 | v34,25.9 34,25.2 34.5,24.7 36.1,24.7 36.6,25.2 v36.6,26 | v15.6,3.9 15.6,5.3 v15.9,5.6 | v11.8,7 11.3,7.5 11.3,8.1 11,8.4 v10.7,8.4 | v42.1,12 41.9,12.2 41.9,14.2 40.1,16 38.6,16 v38.5,16.1
  other vias: 27.32,14.33 25.19,14.79 31.6,25.02
3V3/1.7D2
  Top 0.3: C40.2 IC4.A2
ALERT  (1 unrouted)
D+  (1 unrouted)
D-  (1 unrouted)
DEC1  (via drill 0.35)
  Top 0.3: C5.2 26.55,24.2 26.5,24.2 v25.9,24.8 | U1.P$C1 31.48,24.52 v31.2,24.8
  Bottom 0.3: v25.9,24.8 26,24.9 30,24.9 30.3,24.6 31,24.6 v31.2,24.8
DEC3
  Top 0.3: C11.1 38.22,25.3 38,25.3 37.6,24.9 U1.P$D23
DEC4_6  (via drill 0.35)
  Top 0.04: C10.1 39.25,17.25 39.25,17.5 40,18.25 40,21 39.5,21.5 41.25,23.25 41.25,24.75 39.5,26.5 39.5,27 40.5,28 40.5,28.5 42,30 42,31.75 39,34.75 31.25,34.75 29,32.5 31.5,30 32.25,30.75 32.3,30.75 | 35.12,24.75 33.88,24.75 33.38,25.25 33.25,25.25 33,25 32.88,25 U1.P$B5 | 35.12,24.75 37.12,24.75 37.88,25.5 37.88,25.62 38.25,26 38.88,26 39.12,25.75 39.12,25.5 38.75,25.12 38.5,25.12 38.38,25 38.38,24.25 38.12,24 U1.P$E24 | 35.12,24.75 35.12,25.25 34.62,25.75 34.62,26 C15.2
  Top 0.3: L3.2 C16.1 33.57,31.3 32.8,31.3 32.3,30.8 32.3,30.75 v32.3,30.4 | L3.2 | C15.2 35.18,26.6 35.2,26.6 35.2,26.8 v35.4,27
  Bottom 0.3: v35.4,27 35.4,27.3 v32.3,30.4
DN  (via drill 0.35)
  Top 0.3: J5.A7 22.85,28.05 23,27.9 23.5,27.9 23.85,28.25 J5.B7 23.85,30.35 24.3,30.8 24.4,30.8 25.3,31.7 25.3,32.7 v25.9,33.3 | D8.1 38.13,28.6 35.3,28.6 35.3,29.1 31.5,29.1 28.3,32.3 28.3,33.1 28.7,33.5 28.7,34 v28.6,34.1
  Bottom 0.3: v28.6,34.1 28.1,34.6 27.1,34.6 25.9,33.4 v25.9,33.3
DP  (via drill 0.35)
  Top 0.3: J5.B6 22.35,29.65 22.8,30.1 23,30.1 23.15,29.95 | 23.15,29.95 23.35,29.75 J5.A6 | D8.3 41.6,30.06 41.6,31.7 40.3,33 33.3,33 32.8,32.5 v29.4,32.5 | v24.6,32.3 23.15,30.85 23.15,29.95
  Bottom 0.3: v29.4,32.5 29.2,32.3 v24.6,32.3
EPD_3V3  (via drill 0.35)
  Top 0.3: C1-EP-DR1.2 3.23,30.44 L4.P$1 3.39,26.41 4.9,24.9 8.2,24.9 9.08,25.78 Q4.3 9.38,26.4 v10.7,26.4 | EPD_C13.2 11.6,16.25 J3.15 J3.16
  Bottom 0.3: v10.7,26.4 11.3,25.8 11.3,21 12.6,19.7 12.6,18.3 12.7,18.2 12.7,17.36 EPD_C13.2
  other vias: 12.31,16.96
EPD_BUSY  (1 unrouted)
EPD_CS  (1 unrouted)
EPD_DC  (1 unrouted)
EPD_RST  (1 unrouted)
GDR  (via drill 0.35)
  Top 0.3: Q2.1 9.27,31.95 R2_EP_DR1.2 10.15,32.26 v10.4,32.5 | J3.2 10.55,22.75 10.2,23.1 v10.2,23.4
  Bottom 0.3: v10.2,23.4 10.1,23.5 10.1,27.3 12,29.2 12,31.6 11.1,32.5 v10.4,32.5
GND  (via drill 0.3 pad 0.61, 0.35, 0.6 pad 0.3)
  Top 0.3: SJ1.1 12.26,32.54 13.19,33.47 15.9,33.47 | 15.9,33.47 J5.SH2 J5.SH4 19.13,28.98 19.13,27.97 | R_TYPE_SEL1.1 11.95,32.45 SJ1.1 | J3.17 11.89,15.25 EPD_C14.1 13.12,16.48 | 15.7,14.3 15.7,13.5 15.11,12.91 EPD_C16.1 14.49,13.09 EPD_C17.1 13.79,12.99 EPD_C18.1 13.79,10.29 13.5,10 12.92,10 EPD_C19.1 | 15.7,14.3 15.25,14.75 EPD_C15.1 14.69,15.91 14.12,16.48 13.12,16.48 | 13.12,16.48 13.28,16.64 EPD_C13.1 13.9,17.59 13.9,18.3 v13.8,18.4 | EPD_C19.1 10.77,9.71 EPD_C20.1 8.93,9.38 8.59,9.71 J3.MP2 | J3.MP1 12.16,24.04 13.09,23.11 EPD_C3.1 13.2,21.93 | C37.1 17.22,26.05 IC1.D2 16.94,25.95 16.35,25.36 16.35,24.9 16.05,24.6 R9.1 15.9,24.6 v15.2,25.3 | 18.6,27.36 C38.1 16.77,28.6 14.8,28.6 13.2,27 13.2,25.9 | 18.6,27.36 C39.2 21,26.72 | 26.02,26.43 C35.2 25.04,26.95 C28.2 24.37,26.89 R1_USB1.1 23.3,27.37 R2_USB1.2 21.84,27.14 21.42,26.72 21,26.72 | 26.02,26.43 26.6,27 26.6,28.45 J5.A1_B12 26.75,28.75 27.35,29.35 27.39,29.35 J5.SH3 27.42,29.6 | J5.A12_B1 19.83,28.67 | 19.83,28.67 19.13,27.97 | 19.13,27.97 18.6,27.45 18.6,27.36 | v17.8,10.3 17.9,10.4 17.9,10.5 18.19,10.79 C23.2 18.19,11.04 C24.1 16.6,11.52 v16.6,12.5 | v16.6,9.2 16.78,9.02 IC9.B1 IC9.C1 IC9.C2 IC9.C3 | SJ1.1 10.9,32.14 R2_EP_DR1.1 10.51,31.75 D6.1 | EPD_C19.1 14.4,7.93 14.4,7.4 14.05,7.05 C41.1 13.52,7.2 12.8,7.2 v12.7,7.1 | IC4.B3 5.97,5.5 6.9,5.5 7.1,5.7 7.1,6.2 6.45,6.85 C40.1 4.65,6.85 4.3,6.5 4.3,5.8 4.5,5.6 | 4.5,5.6 4.7,5.4 IC4.B1 | 4.5,5.6 3.9,5 3.9,4.5 4.5,3.89 C36.1 5.54,4.03 SW_UP.1 10.63,4.03 11.3,4.7 v11.9,4.7 | 28.71,14 28.71,15.09 28.5,15.29 C19.1 27.3,15.31 27.3,16.4 | 28.71,14 TP8.TP
  Top 0.3: C5.1 28.71,24.71 U$1.4 29.27,24.98 U$1.2 30.43,23.02 C18.2 30.02,22.69 C1.1 28.6,21.27 v28.6,21.1 | C5.1 28.02,24.4 27,23.37 C17.1 | C3.2 39.65,20.63 C9.2 39.65,18.55 C10.2 38.29,17.2 36.07,17.2 36.07,16.6 C7.2 | C7.2 33.93,16.6 C20.2 32.32,17.52 C21.2 29.8,19.87 C6.2 | J5.SH1 27.42,29.6 | C6.2 29.43,20.4 v29.3,20.4 28.7,19.8 28.7,18.2 27.3,16.8 27.3,16.4 | C7.2 35.4,16.59 C8.2 36.62,12.38 37.3,11.7 | C5.1 26.3,26.43 26.02,26.43 | 21,26.72 19.83,27.89 19.83,28.67 | C6.2 30.06,20.3 30.2,20.3 30.5,20.6 30.5,20.8 30.55,20.85 C4.2 | 13.2,25.9 13.2,25.5 15.6,23.1 16.6,23.1 | 16.6,23.1 17.52,23.1 C26.1 | 16.74,22.96 18.51,21.19 TP_BAT_GND1.TP | 16.6,23.1 16.74,22.96 | 16.74,22.96 U2.4 19.46,22.96 19.8,23.3 | 19.8,23.3 20.15,23.64 U2.9 20.4,23.46 U2.6 21.91,23.46 C22.2 | 19.8,23.3 19.8,24.12 19.46,24.46 U2.1 | v13.1,19.7 11.29,19.7 J3.8 11.81,19.75 EPD_C4.1 13.01,21.73 13.2,21.93 | v29.6,27.9 27.9,29.6 27.42,29.6 | J1.3 J1.5 39.71,11.49 38.6,12.6 38.2,12.6 37.3,11.7 | C1-EP-DR1.1 1.34,31.34 3.9,33.9 10.4,33.9 11.1,34.6 15.6,34.6 15.9,34.3 15.9,33.47 | C33.2 19.11,5.95 C25.1 21.09,4.03 SW_ENT.1 22.1,4.53 22.1,6.1 22.5,6.5 23.5,6.5 | C44.1 24.21,6.5 23.5,6.5 | 23.5,6.5 23.5,5.8 v23.2,5.5 | D8.2 39.13,28.03 38.6,27.5 38,27.5 37.36,28.14 C12.2 36.2,28.14 C13.2 35.65,28.04 C15.1 34.35,27.34 C14.1 33.34,27.34 C2.1 | D8.2 39.13,28.83 40.9,30.6 40.9,31.7 40.68,31.92 C16.2 | D8.2 39.13,25.99 C11.2 40.08,25.62 40.8,24.9 40.8,24.2 40.2,23.6 37.77,23.6 U1.P$F23 37.6,23.9 38.1,24.4 v38.1,24.6 | IC3.8 IC3.9 24.69,15.91 v25,15.6 | R3.1 28.1,13.39 28.71,14 | 27.3,16.4 v27.2,16.5 | SW_DN.1 35.24,6.66
  Top 0.3: 35.24,6.66 35.57,6.99 C45.1 | 35.24,6.66 35.24,8.34 36.6,9.7 v37.1,9.7 | v37.3,11.4 37.3,11.7 | U1.P$B7 33.35,24.37 U1.P$75 | 13.2,21.93 13.63,21.93 14.3,22.6 v14.3,22.8 | v17.8,15.1 17.5,15.4 16.8,15.4 15.7,14.3 | 13.2,25.9 13.3,26 13.8,26 14,25.8 v14,25.5
  Bottom 0.3: v17.8,10.3 16.9,9.4 16.8,9.4 v16.6,9.2 16.6,7.6 17.2,7 21.7,7 v23.2,5.5 | v29.3,20.4 v28.6,21.1 | v13.8,18.4 13.8,19 v13.1,19.7 | v29.6,27.9 29.5,27.8 29.5,27.12 33.05,23.57 U1.P$79 U1.P$80 U1.P$76 U1.P$75 | v27.2,16.5 26.6,17.1 26,17.1 25.7,16.8 25.7,16 25.3,15.6 v25,15.6 | v37.1,9.7 37.5,10.1 37.5,11.2 v37.3,11.4 | U1.P$84 U1.P$88 U1.P$87 U1.P$83 | U1.P$90 U1.P$89 U1.P$85 U1.P$86 | U1.P$77 U1.P$81 36.6,22.87 | 36.6,22.87 U1.P$82 | 36.6,22.87 36.65,22.92 U1.P$78 37.38,24.8 37.9,24.8 v38.1,24.6 | v14.3,22.8 15,23.5 15,25.1 v15.2,25.3 15,25.5 v14,25.5 | v16.6,12.5 16.6,13.5 17.8,14.7 v17.8,15.1 | v11.9,4.7 12.7,5.5 v12.7,7.1
  other vias: 45.32,27.1 42.9,27.1 40.8,19.8 40.8,21.8 41.4,27.1 44.7,18.5 43.4,18.5
  pour Top (isolate 0.2): 2.43,-0.32 44.67,-0.32 46.12,1.13 46.12,33.97 43.67,36.42 1.63,36.42 -1.32,33.47 -1.32,3.43
  pour Bottom (isolate 0.2): -0.72,2.98 -0.74,2.96 -0.82,2.87 -0.82,0.93 0.23,-0.12 44.27,-0.12 46.22,1.83 46.22,31.57 41.57,36.22 2.53,36.22 -0.72,32.97
  pour Route2 (isolate 0.2): 0.43,-0.52 41.67,-0.52 47.62,5.43 47.62,29.67 39.87,37.42 6.13,37.42 -2.62,28.67 -2.62,2.53
  pour Top: 52.02,38.87 51.97,38.92 -3.62,38.92 -3.64,38.94 -3.72,39.02 -3.72,-2.83 -3.72,-2.82 52.32,-2.82 52.04,-2.54 52.02,-2.52
  pour Bottom: -6.34,40.84 -6.32,40.82 -6.32,-3.87 -5.87,-4.32 55.42,-4.32 55.14,-4.04 55.12,-4.02 55.12,41.12 54.94,40.94 54.92,40.92 -6.42,40.92
HAPTIC_EN  (1 unrouted)
IMU_INT1  (via drill 0.35)
  Top 0.3: IC3.5 26.04,15 26.1,15 26.2,14.9 v26.2,14.5 | v23.5,16.2 23.3,16.4 23.3,18 v23.9,18.6 | v29.3,18.4 29.7,18.8 29.7,19.4 v29.9,19.6
  Bottom 0.3: v26.2,14.5 26.2,14.2 25.8,13.8 25.6,13.8 23.5,15.9 v23.5,16.2 | v23.9,18.6 24.3,19 26.2,19 26.8,18.4 v29.3,18.4 | v29.9,19.6 30.6,20.3 30.8,20.3 31,20.5 31,20.9 30.7,21.2 30.1,21.2 29.7,21.6 29.7,21.8 29.9,22 31.58,22 U1.P$N1
  other vias: 31.6,22.02
IMU_INT2  (via drill 0.35)
  Top 0.3: IC3.6 26.18,15.82 26.2,15.8 v26.2,15.3
  Bottom 0.3: v26.2,15.3 26.4,15.1 27.5,15.1 29.9,17.5 29.9,18.4 32,20.5 32,21.67 U1.P$P2
  other vias: 32.1,21.77
LX1
  Top 0.3: IC9.B2 IC9.B3 19.02,9.02 19.2,9.2 19.2,10.98 L7.1
LX2  (via drill 0.35)
  Top 0.3: v19.05,8.35 18.9,8.2 18.88,8.22 IC9.D3 IC9.D2 | v19.8,10.2 19.8,12.44 L7.2
  Bottom 0.3: v19.05,8.35 19.8,9.1 v19.8,10.2
MOSI  (1 unrouted)
N$1
  Top 0.3: R4.2 16.92,8.22 IC9.D1
N$2
  Top 0.3: R2.2 17.53,7.79 IC9.E1
N$3  (via drill 0.35)
  Top 0.3: R3.2 24.59,13.8 24.1,13.8 v24,13.7 | v23.5,14.9 24.09,14.9 IC3.1
  Bottom 0.3: v24,13.7 23.6,14.1 23.6,14.8 v23.5,14.9
N$4
  Top 0.3: C3.1 39.13,22.75 L1.1 39.05,23.27 U1.P$H23
N$5  (via drill 0.35)  (1 unrouted)
  Top 0.04: C22.1 23.25,23 23.25,20 22,18.75 22,15.75 23.25,14.5 24.25,14.5 24.5,14.75 24.5,16 24,16 24,17 24.5,17.5 26,17.5 29.25,20.75 29.5,20.75 29.75,20.5 30,20.75 C4.1
  Top 0.3: v38.8,23.9 39,24.1 39,24.22 L1.2 39.38,24.6 v40.3,24.6 | v30.5,21.6 30.5,21.4 C4.1
  Bottom 0.3: v38.8,23.9 38.7,23.8 38.6,23.8 37.1,22.3 32.3,22.3 31.6,21.6 v30.5,21.6 | v41,25.5 40.8,25.3 40.8,25.1 v40.3,24.6
N$7
  Top 0.3: R9.2 15.95,25.46 IC1.D1
N$10
  Top 0.3: U1.P$N24 38.6,21.52 38.6,19.5 C9.1
N$22
  Top 0.3: Q2.3 6.27,32.47 5.79,31.99 L4.P$2 5.79,28.5 C2-EP-DR1.1 6.09,28.8 D7.2
N$23  (via drill 0.35)
  Top 0.3: R1_EP_DR1.1 11.62,34.14 R_TYPE_SEL1.2 13.05,34.14 13.1,34.1 v13.2,34.1 | v15.3,32.6 14.84,32.14 SJ1.2
  Bottom 0.3: v13.2,34.1 13.9,33.4 15,33.4 15.3,33.1 v15.3,32.6
N$24
  Top 0.3: C2-EP-DR1.2 5.3,27.5 4.9,27.9 4.9,33.1 5.1,33.3 7.4,33.3 8.4,32.3 8.4,32.2 7.3,31.1 D6.2 D1.1
N$25
  Top 0.3: J3.4 11.95,21.75 EPD_C3.2
N$26
  Top 0.3: J3.5 11.73,21.25 EPD_C4.2
N$27
  Top 0.3: J3.18 12.36,14.75 EPD_C14.2
N$28
  Top 0.3: J3.19 13.23,14.25 EPD_C15.2
N$29
  Top 0.3: J3.20 14.54,13.75 EPD_C16.2
N$30
  Top 0.3: J3.22 12.08,12.75 EPD_C18.2
N$31
  Top 0.3: J3.24 11.24,11.15 EPD_C20.2
N$32
  Top 0.3: R1_USB1.2 23.77,27.67 24.35,28.25 J5.A5
N$33
  Top 0.3: R2_USB1.1 21.3,28.69 J5.B5
N$38
  Top 0.3: U1.P$AC5 32.81,19.48 32.81,18.69 C20.1
N$56
  Top 0.3: L2.2 35.56,30.15 L3.1
N$57  (via drill 0.35)
  Top 0.3: L2.1 32.35,28.55 31.1,27.3 v31.1,28.3 | U1.P$B3 32.17,25.2 v32.1,25.2
  Bottom 0.3: v31.1,28.3 31.1,26 31.9,25.2 v32.1,25.2
N$71
  Top 0.3: U1.P$A18 C13.1
N$74  (via drill 0.35)
  Top 0.3: U$1.3 31.11,25.66 C2.2 32.77,25.8 v33.1,25.8 | v37.8,26.7 37.8,25.82 37.6,25.62 U1.P$A23
  Bottom 0.3: v33.1,25.8 33.8,26.5 37.6,26.5 v37.8,26.7
N$75  (1 unrouted)
  Top 0.3: C1.2 29.08,23.72 U$1.1
OUT+  (via drill 0.35)
  Top 0.3: TP_OP1.TP 1.7,4.76 1.7,7.3 3,8.6 5.8,8.6 v6,8.4 | v6.4,6.1 6.2,5.9 IC4.A3
  Bottom 0.3: v6,8.4 6.4,8 v6.4,6.1
P0.00/XL1  (via drill 0.35)
  Top 0.3: v28.2,23.9 28.1,23.9 27.97,23.77 C17.2 27.97,22.31 X2.3 | v31.4,23.9 31.73,23.9 U1.P$D2
  Bottom 0.3: v31.4,23.9 v28.2,23.9
P0.01/XL2
  Top 0.3: X2.1 27.38,20.4 28.6,20.4 30.3,22.1 30.8,22.1 31.07,22.37 C18.1 31.07,22.87 31.5,23.3 31.8,23.3 32.1,23.6 U1.P$F2
P0.13  (via drill 0.35)
  Top 0.3: R1.1 10.89,7.6 C41.2 12.8,8.47 12.8,8.6 v12.6,8.8 | v14.4,4.1 14.33,4.03 SW_UP.2 | U1.P$AD8 33.6,19.3 v33.4,19.5 | v28.9,17.5 30.8,17.5 v30.9,17.4
  Bottom 0.3: v12.6,8.8 12.9,9.1 13.9,9.1 14.3,8.7 | 14.3,8.7 14.9,8.1 14.9,4.6 v14.4,4.1 | 14.3,8.7 14.3,12.5 17.7,15.9 19.6,15.9 20.3,15.2 21.6,15.2 24.2,17.8 28.6,17.8 v28.9,17.5 | v33.4,19.5 33.4,19.4 31.8,17.8 31.3,17.8 v30.9,17.4
P0.14  (via drill 0.35)
  Top 0.3: R6.1 21.41,7.2 24.36,7.2 C44.2 | SW_ENT.2 25.7,5.33 25.7,7 25.16,7.54 C44.2 | C44.2 24.1,8.15 24.1,10.7 25.2,11.8 26.4,11.8 v27.1,12.5
  Bottom 0.3: v27.1,12.5 31.6,17 32,17 33.85,18.85 U1.P$AC9
  other vias: 33.85,19.52
P1.01  (1 unrouted)
  Top 0.3: Q4.1 7.47,27.16 R_PWR_EPD1.1
P1.02  (via drill 0.35)  (1 unrouted)
  Top 0.3: SW_DN.2 37.2,5.83 37.2,6.6 36.26,7.54 C45.2 36.2,8 36.3,8 v36.4,8.1 | R10.1 32.8,7.5 34.1,7.5 v34.4,7.8
  Bottom 0.3: v34.4,7.8 34.9,8.3 36.3,8.3 36.4,8.2 v36.4,8.1
PREVGH  (via drill 0.35)
  Top 0.3: EPD_C17.2 12.56,13.25 J3.21 11.19,13.2 10.3,13.2 9.7,13.8 v9.7,15.7 | D7.1 10.5,26.93 11.23,26.93 11.23,25.87 10.77,25.87 v9.6,24.7
  Bottom 0.3: v9.6,24.7 9.6,15.8 v9.7,15.7
PREVGL  (via drill 0.35)
  Top 0.3: EPD_C19.2 12.22,11.07 12.22,11.67 11.64,12.25 J3.23 11.19,12.2 v8.9,12.2 | D1.2 10.71,29.85 11.6,28.96 11.6,26.4 15,23 15,20.4 13.6,19 v12.1,19 | v8.7,18.3 9.4,19 v10.4,19
  Bottom 0.3: v8.7,18.3 8.2,17.8 8.2,12.9 v8.9,12.2 | v12.1,19 v10.4,19
RESE
  Top 0.04: J3.3 11,22.25 10.75,22 10.75,19.5 11.75,19.5 11.75,18.75 12.75,17.75 15.25,20.25 15.25,23 12,26.25 12,29.5 11,30.5 9.75,30.5 8.75,31.5 8.5,31.5 8.25,31.75 8.75,32.25 8.75,32.5 8.5,32.75 9,33.25 Q2.2
  Top 0.3: Q2.2 R1_EP_DR1.2
RESET  (via drill 0.35)
  Top 0.3: J1.6 39.21,10.38 36.62,10.38 34,13 | 34,13 32.6,13 TP5.TP | 34,13 33.6,13.4 33.6,15.67 v34,16.07 | v34.1,18.4 34.4,18.4 34.85,18.85 U1.P$AC13
  Bottom 0.3: v34.1,18.4 34,18.3 v34,16.07
SCK  (1 unrouted)
SCL  (via drill 0.35)  (2 unrouted)
  Top 0.3: U2.7 22.46,23.96 22.75,24.25 | 22.75,24.25 23.4,24.9 23.4,25.2 22.7,25.9 v20.7,25.9 | v15,27.1 15.25,26.85 IC1.B1 | R17.2 16.41,4.5 TP_SCL.TP | R17.2 16.07,4.36 14.93,5.5 7.7,5.5 7.6,5.6 7.6,6.5 6.3,7.8 4.2,7.8 3,6.6 3,5.1 v3.1,5 | v4.5,4.6 4.57,4.6 IC4.C1 | IC3.12 24.09,15.4 22.9,15.4 22.5,15.8 22.5,18.9 24.3,20.7 24.3,23.7 23.75,24.25 22.75,24.25 | R17.2 16.9,4.98 16.9,5 17.3,5.4 v17.4,5.4
  Bottom 0.3: v20.7,25.9 19.9,25.9 19.1,26.7 13.9,26.7 14.3,27.1 v15,27.1 | v3.1,5 3.7,4.4 4.3,4.4 v4.5,4.6 | v17.4,5.4 17.4,6 16.3,7.1 15.8,7.1 15.4,7.5 15.4,7.8 R4.1
  other vias: 16.09,8.49
SDA  (via drill 0.35)
  Top 0.04: TP_SDA.TP 18.25,2.12 20.38,4.25 19,5.62 17.62,5.62 17.5,5.75 17.5,6 17.88,6.38 19.75,6.38 20.62,7.25 21.12,7.25 21.25,7.38 21.38,7.38 23.88,9.88 23.88,11 25.38,12.5 25,12.88 24.38,12.88 23,14.25 23,14.3
  Top 0.3: IC1.C1 15.55,26.45 14.6,25.5 14.6,24.9 15.8,23.7 16.2,23.7 17.7,25.2 20.39,25.2 U2.8 21.14,24.73 21.8,25.4 22.1,25.4 v22.5,25 | R2.1 14.9,8.98 14.9,11.6 19.2,15.9 21.1,15.9 | 21.1,15.9 22.7,14.3 23,14.3 24.39,14.3 24.69,14.6 IC3.2 | TP_SDA.TP 18.04,2.15 R18.2 15.45,2.15 15.1,2.5 15.1,4.5 14.4,5.2 5.57,5.2 IC4.B2 | 21.1,15.9 20.2,16.8 20.2,18.2 21.1,19.1 v21.8,19.1 | v24.4,25.2 25.4,24.2 25.4,21.8 v25.5,21.7
  Bottom 0.3: v21.8,19.1 22.5,19.8 v22.5,25 22.7,25.2 v24.4,25.2 | v25.5,21.7 25.9,21.3 28,21.3 29.22,22.52 U1.P$L1
  other vias: 31.6,22.52
SWDCLK  (via drill 0.35)
  Top 0.3: v40.1,17.4 40.1,17.3 41.9,15.5 41.9,12.5 41.6,12.2 41.6,10.5 J1.4 40.88,9.79 40.48,9.79 40.1,9.4 39.5,9.4 38.6,8.5 38.6,7.3 39.4,6.5 41,6.5 40.7,6.2 v40.7,5 | TP6.TP 26,9.65 26,5.3 27.4,3.9 30.6,3.9 v30.9,4.2
  Bottom 0.3: v40.1,17.4 40.1,17.5 38.1,19.5 U1.P$AA24 | v30.9,4.2 39.6,4.2 40.4,5 v40.7,5
  other vias: 38.1,20.02
SWDIO  (via drill 0.35)
  Top 0.3: U1.P$AC24 38.2,19.42 38.2,18.6 38.3,18.5 38.8,18.5 v39.1,18.8 | v44.9,11.1 44.9,10.3 44.3,9.7 42.44,9.7 J1.2 41.9,9.53 v41.9,8.7 | TP3.TP 30.51,7.9 v31.8,7.9
  Bottom 0.3: v39.1,18.8 41.9,18.8 45.1,15.6 45.1,11.3 v44.9,11.1 | v31.8,7.9 32.7,8.8 38,8.8 38.7,8.1 38.7,6.9 40,5.6 41.4,5.6 42,6.2 42,8.6 v41.9,8.7
SWO  (via drill 0.35)
  Top 0.3: TP4.TP 27.5,7.31 27.5,10.5 27.7,10.7 29.6,10.7 31.5,12.6 31.5,14.4 v32.4,15.3 | v37.6,19.5 37.58,19.5 U1.P$AD22
  Bottom 0.3: v32.4,15.3 37.1,15.3 37.9,16.1 37.9,19.2 v37.6,19.5
VBAT  (via drill 0.35)
  Top 0.3: IC1.C2 17.57,26.45 17.95,26.08 C37.2 17.95,25.84 17.6,25.5 17.3,25.5 v16.9,25.1 | v17.6,24.3 17.94,23.96 U2.2 U2.3 18.43,23.46 C26.2 | TP_VBAT1.TP 20.42,22.1 18.4,22.1 v18.1,22.4
  Bottom 0.3: v17.6,24.3 17.6,24.4 v16.9,25.1 16.9,23.6 v18.1,22.4
VBUS  (via drill 0.35)
  Top 0.3: IC1.A2 17.04,27.35 17.44,27.35 C38.2 16.92,27.9 16.5,27.9 v16.3,28.1 | C28.1 25.46,27.51 C35.1 25.57,27.8 | 25.57,27.8 25.57,28.68 J5.A4_B9 25.3,28.95 25.3,30.7 v25.6,31 26.7,31 v26.8,31.1 | C21.1 32.23,18.89 U1.P$AD2 32.08,19 31.4,19 v31.2,19.2 | v20.6,27.8 20.7,27.9 J5.A9_B4 | 25.57,27.8 25.47,27.9 v24.7,27.9
  Route15 0.3: v16.3,28.1 16.3,28.7 16.5,28.9 17.2,28.9 18,28.1 18,28 18.3,27.7 20.5,27.7 v20.6,27.8 20.7,27.9 v24.7,27.9 | v26.8,31.1 30.6,31.1 33.2,33.7 37,33.7 39.13,31.57 D8.5
  Bottom 0.3: v31.2,19.2 26.7,19.2 25,20.9 25,24.96 25.37,25.33 25.5,25.33 28.8,28.63 28.8,30.9 27.7,32 26,32 25.6,31.6 v25.6,31
  other vias: 39.13,31.05
VREG  (via drill 0.35)
  Top 0.3: IC1.B2 18.14,26.85 C39.1 18.27,26.63 v18.8,26.1 | C23.1 18.44,9.5 IC9.A3 IC9.A2 IC9.A1 16.91,10.07 C24.2 16.12,9.82 v15.5,9.2 | TP2.TP 21.95,13.05 20.3,14.7 19.1,14.7 v19,14.6 19,15.1 v19.2,15.3
  Route15 0.3: v19,14.6 19,14 16.9,11.9 15.5,11.9 14.8,11.2 14.8,9.9 v15.5,9.2 | v19.2,15.3 19.2,25.7 v18.8,26.1